# Altium PCB BenchSignalGenerator.PcbDoc (part 2 of 3)
Units mm, origin at the board's own origin, x right, y up, seen from the top; angles counter-clockwise.
Board outline 98.17 x 87.5 mm, 4 copper layers (Top Layer, Ground, 3.3, Bottom Layer), stack 0.603 mm thick; 75 components, 70 nets, 305 pads, 51 vias.
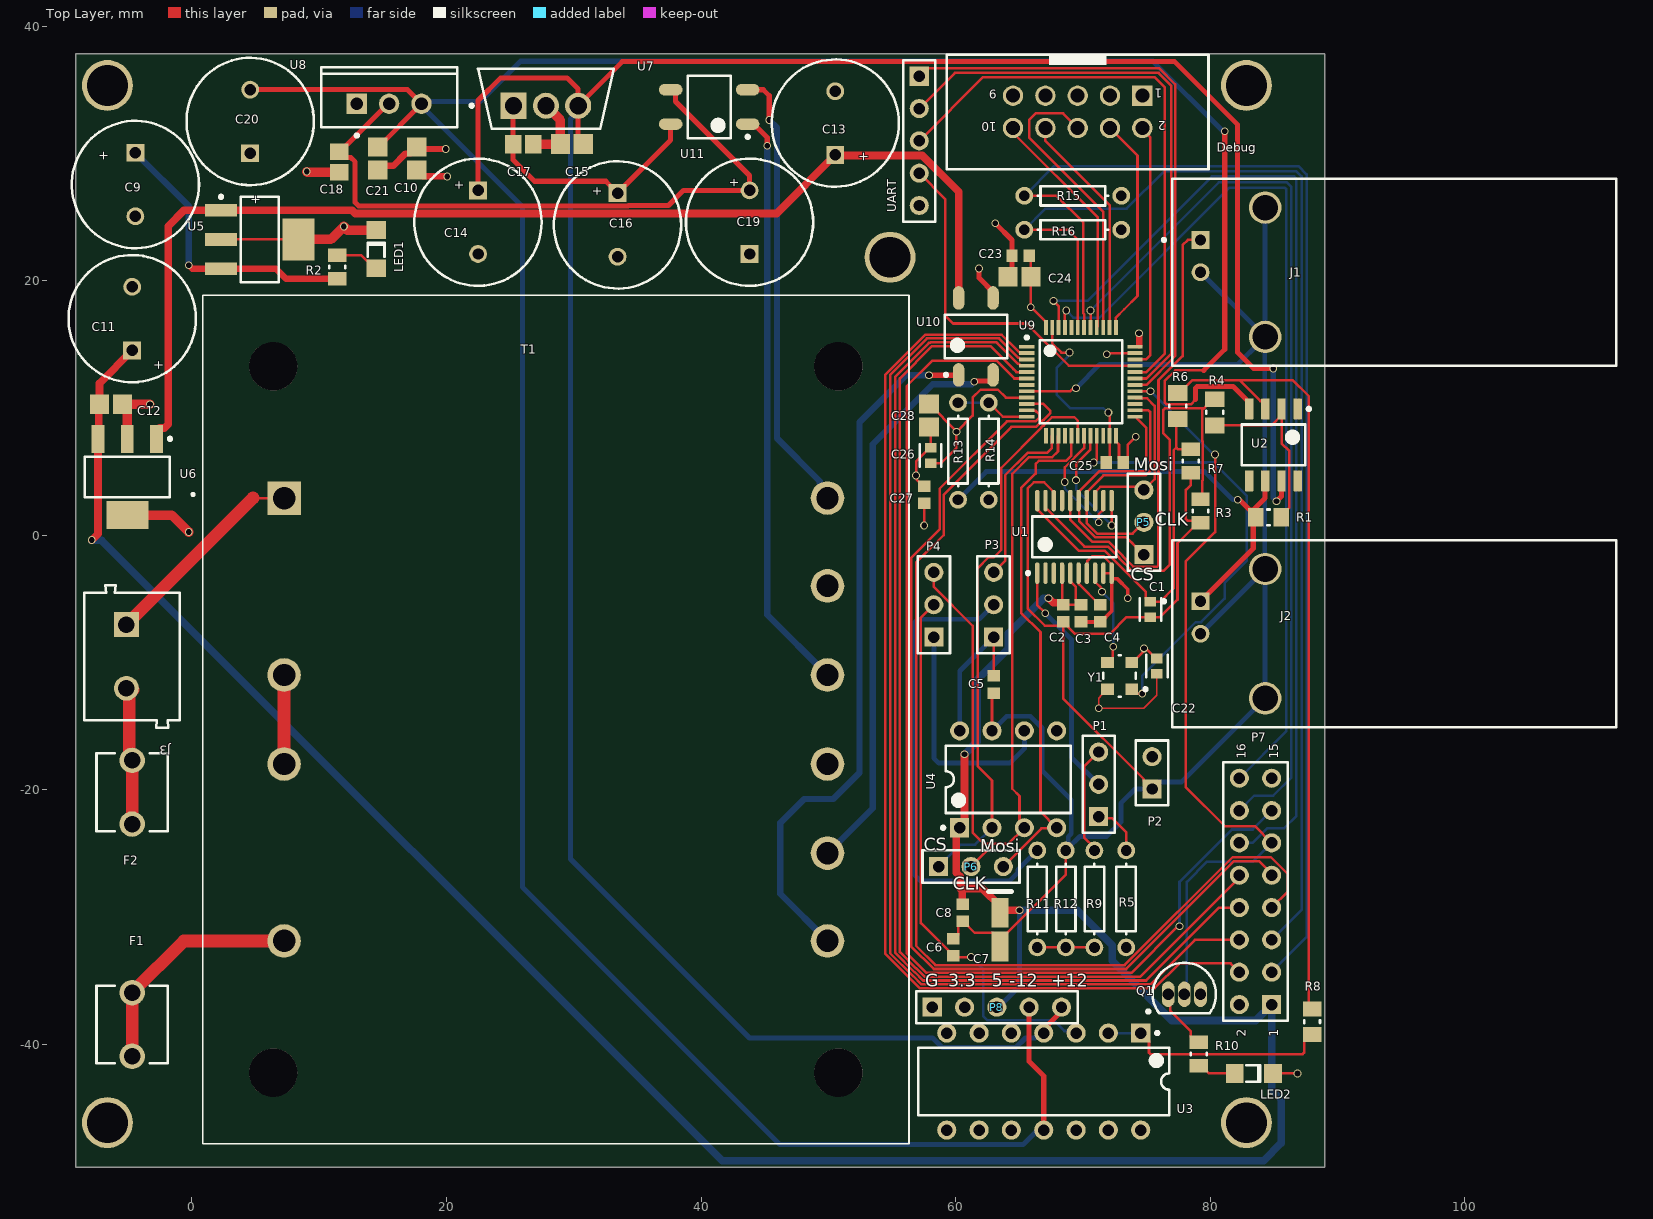
[diagram p0: Top Layer view]

## Part data (continued)
R4 R6: library part CMP-2001-03596-1, Case Code (Imperial)=0805, Case Code (Metric)=2012, Manufacturer="Vishay Dale", Max Operating Temperature=155°C, Max Power Dissipation=125mW, Min Operating Temperature=-55°C, Package Quantity=10000, Resistance=1kR, Supplier Part Number 1=541-CRCW08051K00FKEBCT-ND, Temperature Coefficient=100ppm/°C, Tolerance=1%, Voltage Rating=150V, Case/Package=0805, Category="Chip SMD Resistors", ComponentLink1Description=https://datasheet.ciiva.com/5548/dcrcwe3-109170-5548552.pdf?src-supplier=Mouser, ComponentLink1URL=https://datasheet.ciiva.com/5548/dcrcwe3-109170-5548552.pdf?src-supplier=Mouser, ComponentLink2Description=https://datasheet.ciiva.com/7725/1847332-7725820.pdf?src-supplier=Element14, ComponentLink2URL=https://datasheet.ciiva.com/7725/1847332-7725820.pdf?src-supplier=Element14, ComponentLink3Description=https://datasheet.ciiva.com/9112/dcrcwe3-9112206.pdf?src-supplier=Avnet, ComponentLink3URL=https://datasheet.ciiva.com/9112/dcrcwe3-9112206.pdf?src-supplier=Avnet, ComponentLink4Description=https://datasheet.ciiva.com/46391/1807946-46391934.pdf?src-supplier=Element14, ComponentLink4URL=https://datasheet.ciiva.com/46391/1807946-46391934.pdf?src-supplier=Element14, Composition="Thick Film", Contact Plating=Tin, Depth=1.25mm, Features="Automotive AEC-Q200", Height=0.02inch, Lead Free="Lead Free", Length=2mm, Manufacturer Part Number=CRCW08051K00FKEB, Military Standard=Not, Number of Pins=2, Number of Terminations=2, Packaging="Tape and Reel", Part Number=CRCW08051K00FKEB, Power Rating=125mW, Pricing 1="1=0.10000, 10=0.06000, 100=0.02450, 1000=0.01102, 2500=0.00957, 5000=0.00790 (USD)", Radiation Hardening=No, REACH SVHC=Unknown, RoHS=Yes, Stock 1=1, Supplier 1=Digi-Key, Termination=SMD/SMT, Voltage Rating (DC)=150V, Weight=0.000194oz, Width=1.25mm
R5 R9 R15 R16: "Resistor", LatestRevisionDate=17-Jul-2002, LatestRevisionNote="Re-released for DXP Platform.", PackageDescription="Axial Device, Thru-Hole; 2 Leads; 0.3 in Pin Spacing", PackageReference=AXIAL-0.3, Published=8-Jun-2000, Publisher="Altium Limited"
R11 R12 R13 R14: library part Res1, "Resistor", LatestRevisionDate=17-Jul-2002, LatestRevisionNote="Re-released for DXP Platform.", PackageDescription="Axial Device, Thru-Hole; 2 Leads; 0.3 in Pin Spacing", PackageReference=AXIAL-0.3, Published=8-Jun-2000, Publisher="Altium Limited"
T1: "International One-4-All Triple Output Transformer"
U1: library part CMP-0293-00051-1, "20 mW Power, 2.3 V to 5.5 V, 75 MHz Complete DDS, 10-Bit, Serial, RU-20, 1000 Reel, Pb-Free", Case/Package=TSSOP, Frequency=75MHz, Manufacturer="Analog Devices", Max Operating Temperature=105°C, Max Supply Current=5mA, Max Supply Voltage=5.5V, Min Operating Temperature=-40°C, Min Supply Voltage=2.3V, Nominal Output Voltage=600mV, Nominal Supply Current=8.7mA, Package Quantity=1000, Power Dissipation=40mW, Supplier Part Number 1=505-AD9834CRUZ-REEL7CT-ND, Category="Integrated Circuits (ICs)", Code_JEDEC=MO-153AC, Compliance Range (V)=800mV, ComponentLink1Description="Manufacturer URL", ComponentLink1URL=www.analog.com, ComponentLink2Description=Datasheet, ComponentLink2URL=http://www.analog.com/static/imported-files/data_sheets/AD9834.pdf, ComponentLink3Description="Package Specification", ComponentLink3URL=http://www.analog.com/static/imported-files/packages/364515793657813558433715854054607941441RU20.pdf, ComponentLink4Description=https://datasheet.ciiva.com/26828/ad9834cruz-reel7-26828141.pdf?src-supplier=IIIC, ComponentLink4URL=https://datasheet.ciiva.com/26828/ad9834cruz-reel7-26828141.pdf?src-supplier=IIIC, ComponentLink5Description=https://datasheet.ciiva.com/25889/ad9834-25889590.pdf?src-supplier=Avnet+Europe, ComponentLink5URL=https://datasheet.ciiva.com/25889/ad9834-25889590.pdf?src-supplier=Avnet+Europe, Contact Plating=Tin,Matte, DatasheetVersion="Rev. C", FS Iout (mA nom)=3mA, I Supply total (max)=8.7mA, I/O Interface=Serial, Lead Free="Contains Lead", Manufacturer Part Number=AD9834CRUZ-REEL7, Master fclk=75MHz, Mount="Surface Mount", Number of Bits=10, Number of Converters=1, Number of D/A Converters=1, Number of Outputs=1, Number of Pins=20, Operating Supply Current=8.7mA, PackageDescription="20-Lead Thin Shrink Small Outline Package [TSSOP]", PackageReference=RU-20, PackageVersion=2000, Packaging="Tape and Reel", Pricing 1="1=12.89000, 10=11.85000, 25=11.35920, 100=10.00820, 250=9.51700, 500=8.90300 (USD)", REFCLK Multiplier=No, Resolution=10b, Resolution (Bits)=10bit, RoHS=Yes, Signal to Noise Ratio (SNR)=60dB, Stock 1=1285, Supplier 1=Digi-Key, Tuning Word Width (bits)=28bit
U2: library part CMP-0055-00653-3, "Very High Speed, High Output Current, Voltage Feedback Amplifier, 8-pin Narrow SOIC, Pb-Free", Case/Package=SOIC, Dual Supply Voltage=9V, Input Bias Current=10uA, Input Offset Voltage (Vos)=200uV, Manufacturer="Texas Instruments", Max Dual Supply Voltage=18V, Max Operating Temperature=85°C, Max Supply Current=8mA, Max Supply Voltage=36V, Min Dual Supply Voltage=2.75V, Min Operating Temperature=-40°C, Min Supply Voltage=5.5V, Nominal Supply Current=6.5mA, Output Current=100mA, Output Current per Channel=118mA, Package Quantity=95, Package Reference=D0008A, PackageTopMarking=NSZXTT*LM71*71AIM, Power Supply Rejection Ratio (PSRR)=85dB, PowerWise=N, Voltage Gain=78dB, -3db Bandwidth=220MHz, Bandwidth=200MHz, Category="Amplifiers - Op Amps, Buffer, Instrumentation", Code_IPC=SOIC127P600-8, Code_JEDEC=MS-012-AA, Common Mode Rejection Ratio=80dB, ComponentLink1Description="Datasheet URL", ComponentLink1URL=http://www.ti.com/general/docs/lit/getliterature.tsp?genericPartNumber=LM7171&fileType=pdf, ComponentLink2Description=https://datasheet.ciiva.com/15130/getdatasheetpartid-88592-15130434.pdf?src-supplier=Verical, ComponentLink2URL=https://datasheet.ciiva.com/15130/getdatasheetpartid-88592-15130434.pdf?src-supplier=Verical, ComponentLink3Description=https://datasheet.ciiva.com/19465/1302289-19465118.pdf?src-supplier=Jameco, ComponentLink3URL=https://datasheet.ciiva.com/19465/1302289-19465118.pdf?src-supplier=Jameco, ComponentLink4Description=https://datasheet.ciiva.com/6626/lm7171-6626629.pdf?src-supplier=Digi-Key, ComponentLink4URL=https://datasheet.ciiva.com/6626/lm7171-6626629.pdf?src-supplier=Digi-Key, ComponentLink5Description=https://datasheet.ciiva.com/2973/lm7171-2973433.pdf?src-supplier=Avnet, ComponentLink5URL=https://datasheet.ciiva.com/2973/lm7171-2973433.pdf?src-supplier=Avnet, ComponentLink6Description=https://datasheet.ciiva.com/8008/1902708-8008895.pdf?src-supplier=Element14, ComponentLink6URL=https://datasheet.ciiva.com/8008/1902708-8008895.pdf?src-supplier=Element14, CompType=Amplifiers, Contact Plating=Tin,Matte, Gain Bandwidth Product=200MHz, Height=1.45mm, Lead Free="Lead Free", Length=4.9mm, Mount="Surface Mount", Number of Amplifiers=1, Number of Channels=1, Number of Circuits=1, Number Of Elements=1, Number of Pins=8, Operating Supply Current=6.5mA, Operating Supply Voltage=18V, PackageDescription="SOIC Narrow, 4.9 x 3.9 x 1.45mm, 8 Lead, 1.27mm Pitch", Packaging=Rail/Tube, PinCount=8, Pricing 1="1=4.25000, 10=3.81300, 25=3.60440, 100=2.96370, 250=2.65932, 500=2.56320, 1000=2.13066 (USD)", Radiation Hardening=No, REACH SVHC="No SVHC", RoHS=Y, Slew Rate=4100V/µs, Stock 1=1065, Unity Gain Bandwidth Product=125MHz, Width=3.9mm
U3: library part CMP-0017-00818-2, "JFET-Input Operational Amplifier, 7 to 36 V, 0 to 70 degC, 14-pin DIP (N14), Pb-Free (RoHS)", Case/Package=N, Dual Supply Voltage=9V, Input Bias Current=400pA, Input Offset Voltage (Vos)=15mV, Manufacturer="Texas Instruments", Max Dual Supply Voltage=18V, Max Operating Temperature=125°C, Max Power Dissipation=680mW, Min Dual Supply Voltage=3.5V, Min Operating Temperature=-40°C, Nominal Supply Current=11.2mA, Operating Supply Current=1.4mA, Package Quantity=25, Rating=Catalog, Total Supply Voltage(Max)(+5V is 5, +/-5V is 10)=36, Total Supply Voltage(Min)(+5V is 5, +/-5V is 10)=7, Voltage Gain=106.02dB, Bandwidth=3MHz, Category="Amplifiers - Op Amps, Buffer, Instrumentation", CMRR(Min)(dB)=70, Code_JEDEC=MS-001, Common Mode Rejection Ratio=70dB, ComponentLink1Description="Manufacturer URL", ComponentLink1URL=http://www.ti.com/, ComponentLink2Description=Datasheet, ComponentLink2URL=http://www.ti.com/lit/ds/symlink/tl084.pdf, ComponentLink3Description="Package Specification", ComponentLink3URL=http://www.ti.com/lit/ml/mpdi002c/mpdi002c.pdf, ComponentLink4Description=https://datasheet.ciiva.com/15129/getdatasheetpartid-40651-15129703.pdf?src-supplier=Verical, ComponentLink4URL=https://datasheet.ciiva.com/15129/getdatasheetpartid-40651-15129703.pdf?src-supplier=Verical, ComponentLink5Description=https://datasheet.ciiva.com/25628/0900766b800212d0-25628999.pdf?src-supplier=RSComponents, ComponentLink5URL=https://datasheet.ciiva.com/25628/0900766b800212d0-25628999.pdf?src-supplier=RSComponents, ComponentLink6Description=https://datasheet.ciiva.com/14151/tl081-tl084-eng-tds-14151110.pdf?src-supplier=Distrelec, ComponentLink6URL=https://datasheet.ciiva.com/14151/tl081-tl084-eng-tds-14151110.pdf?src-supplier=Distrelec, ComponentLink7Description=https://datasheet.ciiva.com/1796/tl081a-1796122.pdf?src-supplier=Digi-Key, ComponentLink7URL=https://datasheet.ciiva.com/1796/tl081a-1796122.pdf?src-supplier=Digi-Key, ComponentLink8Description=https://datasheet.ciiva.com/26243/tl082-26243803.pdf?src-supplier=Avnet+Europe, ComponentLink8URL=https://datasheet.ciiva.com/26243/tl082-26243803.pdf?src-supplier=Avnet+Europe, ComponentLink9Description=https://datasheet.ciiva.com/7709/1846992-7709948.pdf?src-supplier=Element14, ComponentLink9URL=https://datasheet.ciiva.com/7709/1846992-7709948.pdf?src-supplier=Element14, ComponentLink10Description=https://datasheet.ciiva.com/7709/94128-7709949.pdf?src-supplier=Element14, ComponentLink10URL=https://datasheet.ciiva.com/7709/94128-7709949.pdf?src-supplier=Element14, ComponentLink11Description=https://datasheet.ciiva.com/2974/tl082-2974257.pdf?src-supplier=Avnet, ComponentLink11URL=https://datasheet.ciiva.com/2974/tl082-2974257.pdf?src-supplier=Avnet, Contact Plating=Gold, DatasheetVersion=SLOS081G, Eco-Plan="Pb-Free (RoHS)", Gain Bandwidth Product=3MHz, GBW(Typ)(MHz)=3, Height=4.57mm, IIB(Max)(pA)=400, Iq per channel(Max)(mA)=2.8, Lead Free="Lead Free", Length=19.3mm, Manufacturer Part Number=TL084CN, Max I/O Voltage=15mV, Max Supply Voltage=18V, Mounting Technology="Through Hole", Nominal Gain Bandwidth Product=3MHz, Number of Amplifiers=4, Number of Channels=4, Number of Circuits=4, Number Of Elements=4, Number of Pins=14, Offset Drift(Typ)(uV/C)=18, PackageDescription="14-Pin Plastic In-Line, Body 19.305 x 6.35 mm, Pitch 2.54 mm", PackageReference=N0014A, PackageVersion="4040049/E, 12/2002", Packaging=Rail/Tube, PartNumber=TL084CN, Pricing 1="1=0.55000, 10=0.46900, 25=0.43760, 100=0.32500, 250=0.27500, 500=0.26250, 1000=0.19375, 2500=0.18125, 5000=0.16875 (USD)", Radiation Hardening=No, REACH SVHC="No SVHC", RoHS=Yes, Slew Rate=13V/µs, Slew Rate(Typ)(V/us)=13, Stock 1=8967, Sub Family="General Purpose Amplifier, High Supply Voltage Amplifier (>=30V)", Unity Gain Bandwidth Product=3MHz, Vio (25C)(Max)(mV)=15, Vn at 1kHz(Typ)(nV/rtHz)=18, Width=6.35mm
U4: library part CMP-0188-01065-1, "10-Bit DACs with Internal VREF and SPI Interface, 8-Pin PDIP, Extended Temperature", Case/Package=PDIP, Input Offset Voltage (Vos)=820uV, Max Operating Temperature=125°C, Max Supply Voltage=6.5V, Min Operating Temperature=-40°C, Min Supply Voltage=2.7V, Nominal Supply Current=415uA, Operating Supply Voltage=5.5V, Package Quantity=60, Reference Voltage=2.048V, Category="Digital to Analog Converters (DACs)", Code_JEDEC=MS-001, ComponentLink1Description="Manufacturer URL", ComponentLink1URL=http://www.microchip.com/, ComponentLink2Description=Datasheet, ComponentLink2URL=http://ww1.microchip.com/downloads/en/DeviceDoc/22249A.pdf, ComponentLink3Description="Package Specification", ComponentLink3URL=http://www.microchip.com/stellent/groups/techpub_sg/documents/packagingspec/en012702.pdf, ComponentLink4Description=https://datasheet.ciiva.com/41459/001083272-da-01-en-dac-10b-spi-vref-mcp4812-e-p-pdip-8-mcp-41459029.pdf?src-supplier=Conrad, ComponentLink4URL=https://datasheet.ciiva.com/41459/001083272-da-01-en-dac-10b-spi-vref-mcp4812-e-p-pdip-8-mcp-41459029.pdf?src-supplier=Conrad, ComponentLink5Description=https://datasheet.ciiva.com/3041/22249a-3041497.pdf?src-supplier=Avnet, ComponentLink5URL=https://datasheet.ciiva.com/3041/22249a-3041497.pdf?src-supplier=Avnet, ComponentLink6Description=https://datasheet.ciiva.com/6666/22249a-6666538.pdf?src-supplier=Digi-Key, ComponentLink6URL=https://datasheet.ciiva.com/6666/22249a-6666538.pdf?src-supplier=Digi-Key, ComponentLink7Description=https://datasheet.ciiva.com/16625/22249a-16625662.pdf?src-supplier=Avnet+Europe, ComponentLink7URL=https://datasheet.ciiva.com/16625/22249a-16625662.pdf?src-supplier=Avnet+Europe, DatasheetVersion="revA, Apr-2010", Height=4.95mm, Integral Nonlinearity (INL)=3.5LSB, Interface=SPI,Serial, Lead Free="Lead Free", Length=10.16mm, Mount="Through Hole", Number of Bits=10, Number of Channels=2, Number of Converters=2, Number of DAC Channels=2, Number of Pins=8, Output Type=Voltage, PackageDescription="8-Lead Plastic Dual In-Line (P) - 300 mil Body [PDIP]", PackageReference=PDIP300-P8, PackageVersion="revBB, Aug-2009", Packaging=Rail/Tube, Polarity=Bipolar, Pricing 1="1=2.11000, 25=1.76000, 100=1.60000 (USD)", Radiation Hardening=No, Resolution=10b, RoHS=Yes, Settling Time=4.5us, Stock 1=82, Supply Type=Single, Width=7.11mm
U5: library part CMP-0136-00514-1, "250 mA, 16V, Low Quiescent Current LDO Regulator, 3-Pin SOT-223, Extended Temperature", Case/Package=SOT-223, Dropout Voltage=525mV, Input Bias Current=2uA, Manufacturer=Microchip, Max Input Voltage=16V, Max Operating Temperature=125°C, Max Output Current=250mA, Min Input Voltage=2.7V, Min Operating Temperature=-40°C, Min Output Voltage=3.3V, Output Voltage Accuracy=2%, Package Quantity=78, Quiescent Current=5uA, Supplier Part Number 1=MCP1703-3302E/DB-ND, Accuracy=2%, Category="Voltage Regulators - Linear", ComponentLink1Description=https://datasheet.ciiva.com/3224/jp530937-3224135.pdf?src-supplier=Avnet, ComponentLink1URL=https://datasheet.ciiva.com/3224/jp530937-3224135.pdf?src-supplier=Avnet, ComponentLink2Description=https://datasheet.ciiva.com/8041/22049f-8041354.pdf?src-supplier=Element14, ComponentLink2URL=https://datasheet.ciiva.com/8041/22049f-8041354.pdf?src-supplier=Element14, ComponentLink3Description=https://datasheet.ciiva.com/15200/getdatasheetpartid-771601-15200250.pdf?src-supplier=Verical, ComponentLink3URL=https://datasheet.ciiva.com/15200/getdatasheetpartid-771601-15200250.pdf?src-supplier=Verical, ComponentLink4Description=https://datasheet.ciiva.com/2057/22049f-2057211.pdf?src-supplier=Digi-Key, ComponentLink4URL=https://datasheet.ciiva.com/2057/22049f-2057211.pdf?src-supplier=Digi-Key, ComponentLink5Description=https://datasheet.ciiva.com/29305/651421-da-01-en-ic-reg-ld-mcp1703-3302e-db-sot-223-3-mcp-29305285.pdf?src-supplier=Conrad, ComponentLink5URL=https://datasheet.ciiva.com/29305/651421-da-01-en-ic-reg-ld-mcp1703-3302e-db-sot-223-3-mcp-29305285.pdf?src-supplier=Conrad, Contact Plating=Tin,Matte, DatasheetVersion="revD, Sep-2009", Height=1.6mm, Lead Free="Lead Free", Length=6.5mm, Manufacturer Part Number=MCP1703-3302E/DB, Mount="Surface Mount", Nominal Output Voltage=3.3V, Number of Outputs=1, Number of Pins=3, Output Current=250mA, Output Type=Fixed, Output Voltage=3.3V, PackageDescription="3-Lead Plastic Small Outline Transistor (DB) [SOT-223]", PackageReference=SOT-223-DB3, PackageVersion="revBB, Aug-2009", Packaging=Rail/Tube, Polarity=Positive, Pricing 1="1=0.62000, 25=0.52000, 100=0.47000 (USD)", Radiation Hardening=No, REACH SVHC="No SVHC", RoHS=Yes, Stock 1=2370, Supplier 1=Digi-Key, Width=3.5mm
U6: library part CMP-0136-00522-1, "250 mA, 16V, Low Quiescent Current LDO Regulator, 3-Pin SOT-223, Extended Temperature", Case/Package=SOT-223, Dropout Voltage=330mV, Input Bias Current=2uA, Manufacturer=Microchip, Max Input Voltage=16V, Max Operating Temperature=125°C, Max Output Current=250mA, Min Input Voltage=2.7V, Min Operating Temperature=-40°C, Min Output Voltage=5V, Output Voltage Accuracy=2%, Package Quantity=78, Quiescent Current=5uA, Supplier Part Number 1=MCP1703-5002E/DB-ND, Accuracy=2%, Category="Voltage Regulators - Linear", ComponentLink1Description=https://datasheet.ciiva.com/41458/001085888-da-01-en-ic-reg-ld-mcp1703-5002e-db-sot-223-3-mcp-41458871.pdf?src-supplier=Conrad, ComponentLink1URL=https://datasheet.ciiva.com/41458/001085888-da-01-en-ic-reg-ld-mcp1703-5002e-db-sot-223-3-mcp-41458871.pdf?src-supplier=Conrad, ComponentLink2Description=https://datasheet.ciiva.com/2041/22049f-2041046.pdf?src-supplier=Digi-Key, ComponentLink2URL=https://datasheet.ciiva.com/2041/22049f-2041046.pdf?src-supplier=Digi-Key, ComponentLink3Description=https://datasheet.ciiva.com/3224/jp530937-3224136.pdf?src-supplier=Avnet, ComponentLink3URL=https://datasheet.ciiva.com/3224/jp530937-3224136.pdf?src-supplier=Avnet, ComponentLink4Description=https://datasheet.ciiva.com/8041/22049f-8041355.pdf?src-supplier=Element14, ComponentLink4URL=https://datasheet.ciiva.com/8041/22049f-8041355.pdf?src-supplier=Element14, ComponentLink5Description=https://datasheet.ciiva.com/15200/getdatasheetpartid-626576-15200251.pdf?src-supplier=Verical, ComponentLink5URL=https://datasheet.ciiva.com/15200/getdatasheetpartid-626576-15200251.pdf?src-supplier=Verical, ComponentLink6Description=https://datasheet.ciiva.com/16373/filehandler-aspxddocname-en530937-16373582.pdf?src-supplier=Future+Electronics, ComponentLink6URL=https://datasheet.ciiva.com/16373/filehandler-aspxddocname-en530937-16373582.pdf?src-supplier=Future+Electronics, ComponentLink7Description=https://datasheet.ciiva.com/22629/22049f-22629247.pdf?src-supplier=Farnell, ComponentLink7URL=https://datasheet.ciiva.com/22629/22049f-22629247.pdf?src-supplier=Farnell, DatasheetVersion="revD, Sep-2009", Height=1.6mm, Lead Free="Lead Free", Length=6.5mm, Manufacturer Part Number=MCP1703-5002E/DB, Mount="Surface Mount", Nominal Output Voltage=5V, Number of Outputs=1, Number of Pins=3, Output Current=250mA, Output Type=Fixed, Output Voltage=5V, PackageDescription="3-Lead Plastic Small Outline Transistor (DB) [SOT-223]", PackageReference=SOT-223-DB3, PackageVersion="revBB, Aug-2009", Packaging=Rail/Tube, Polarity=Positive, Pricing 1="1=0.62000, 25=0.52000, 100=0.47000 (USD)", Radiation Hardening=No, REACH SVHC="No SVHC", RoHS=Yes, Stock 1=5236, Supplier 1=Digi-Key, Width=3.5mm
U7: library part CMP-07128-000015-1, "IC REG LINEAR 12V 1A TO220-3", Dropout Voltage=2V, Manufacturer="ON Semiconductor", Max Supply Voltage=35V, Nominal Supply Current=5.1mA, Output Current=1A, Output Voltage=12V, Package=TO220B03, Temperature="-40°C to +125°C", Temperature Range High=+125°C, Temperature Range Low=-40°C, Accuracy Percentage=4%, Automotive=No, Category=IC, ComponentLink2Description=Datasheet, ComponentLink2URL=https://www.mouser.in/datasheet/2/308/LM7812-1125088.pdf, Device Class L1="Integrated Circuits (ICs)", Device Class L2="Power Management ICs", Device Class L3="Voltage Regulators - Linear", Digikey Description="IC REG LINEAR 12V 1A TO220-3", Height=20.4mm, Ipc Land Pattern Name=TO-220, Lead Free=Yes, Manufacturer Part Number=LM7812CT, Number of Outputs=1, Obsolete Part=true, Octopart=https://octopart.com/lm7812ct-on+semiconductor-14383031, Output Type=Fixed, RoHS=TRUE, Standoff Height=2.7mm
U8: library part CMP-0062-02499-3, "3-Terminal Negative Regulators, 3-pin TO-220", Case/Package=TO-220, Current Rating=500mA, Dropout Voltage=1.1V, Manufacturer="Texas Instruments", Max Input Voltage=-35V, Min Input Voltage=-14.5V, Output Voltage=-12V, Output Voltage Accuracy=4%, Package Quantity=45, PackageTopMarking=NSUZXYTTE#*LM79M*12CT, PowerWise=N, Quiescent Current=3mA, Supplier Part Number 1=2156-LM79M12CT-ND, Accuracy=4%, Category="Voltage Regulators - Linear", ComponentLink1Description="Datasheet URL", ComponentLink1URL=http://www.ti.com/general/docs/lit/getliterature.tsp?genericPartNumber=LM79M12&fileType=pdf, ComponentLink2Description=https://datasheet.ciiva.com/3225/lm79m12-3225442.pdf?src-supplier=Avnet, ComponentLink2URL=https://datasheet.ciiva.com/3225/lm79m12-3225442.pdf?src-supplier=Avnet, ComponentLink3Description=https://datasheet.ciiva.com/6583/lm79m05-6583721.pdf?src-supplier=Digi-Key, ComponentLink3URL=https://datasheet.ciiva.com/6583/lm79m05-6583721.pdf?src-supplier=Digi-Key, ComponentLink4Description=https://datasheet.ciiva.com/15111/getdatasheetpartid-55274-15111210.pdf?src-supplier=Verical, ComponentLink4URL=https://datasheet.ciiva.com/15111/getdatasheetpartid-55274-15111210.pdf?src-supplier=Verical, CompType="LDO IC", Lead Free="Contains Lead", Manufacturer Part Number=LM79M12CT, Max Output Current=500mA, Mount="Through Hole", Number of Outputs=1, Number of Pins=3, Number of Regulators=1, Output Current=500mA, Output Type=Fixed, PackageDescription="TO-220, Molded, 3 Lead, Straight", PackageReference=NDE0003A, Packaging=Rail/Tube, PinCount=3, Polarity=Negative, Pricing 1="358=250.60000 (USD)", Radiation Hardening=No, RoHS=N, Stock 1=430, Supplier 1=Digi-Key
U9: library part CMP-12105-000047-1, "IC MCU 32BIT 256KB FLASH 48LQFP", Ambient Temperature Range High=+85°C, Ambient Temperature Range Low=-40°C, Case/Package=LQFP, Frequency=80MHz, Manufacturer=STMicroelectronics, Max Junction Temp=+105°C, Max Operating Temperature=85°C, Max Supply Voltage=3.6V, Min Supply Voltage=1.55V, Package=LQFP48-5B, Supplier Part Number 1=497-16579-ND, Temperature="-40°C to +85°C", Automotive=No, Category=IC, ComponentLink1Description=http://www.farnell.com/datasheets/2283392.pdf?src-supplier=Farnell, ComponentLink1URL=http://www.farnell.com/datasheets/2283392.pdf?src-supplier=Farnell, ComponentLink2Description=Datasheet, ComponentLink2URL=https://www.st.com/resource/en/datasheet/stm32l433cc.pdf, ComponentLink3Description=http://www.farnell.com/datasheets/2283392.pdf?src-supplier=Newark, ComponentLink3URL=http://www.farnell.com/datasheets/2283392.pdf?src-supplier=Newark, ComponentLink4Description=http://www.st.com/content/ccc/resource/technical/document/datasheet/f7/a0/fc/27/24/4e/4f/3f/DM00257192.pdf/files/DM00257192.pdf/jcr:content/translations/en.DM00257192.pdf?src-supplier=Digi-Key, ComponentLink4URL=http://www.st.com/content/ccc/resource/technical/document/datasheet/f7/a0/fc/27/24/4e/4f/3f/DM00257192.pdf/files/DM00257192.pdf/jcr:content/translations/en.DM00257192.pdf?src-supplier=Digi-Key, ComponentLink5Description=http://www.farnell.com/datasheets/2283392.pdf?src-supplier=Element14, ComponentLink5URL=http://www.farnell.com/datasheets/2283392.pdf?src-supplier=Element14, Core Architecture="Arm Cortex-M4", Data Bus Width=32bits, Device Class L1="Integrated Circuits (ICs)", Device Class L2="Embedded Processors and Controllers", Device Class L3=Microcontrollers, Digikey Description="IC MCU 32BIT 256KB FLASH 48LQFP", Height=1.6mm, Interface=I2C,SPI,UART,USART,CAN,USB,LIN,IrDA,SMBus,Other, Ipc Land Pattern Name=QFP50P900X900X160-48, Lead Free=Yes, Manufacturer Part Number=STM32L433CCT6, Memory Size=256KBytes, Memory Type=FLASH, Min Operating Temperature=-40°C, Number Of A/D Converters=1, Number Of Adc Channels=10, Number Of Cores=1, Number Of I2C Channels=3, Number Of I/Os=38, Number Of Pwm Channels=14, Number Of Spi Channels=3, Number Of Timers/Counters=9, Number Of Uart Channels=4, Number Of Usb Channels=1, Octopart=https://octopart.com/stm32l433cct6-stmicroelectronics-71093511, Oscillator Type=Internal, Packaging=Tray, Peripherals="Brown-out Detect/Reset,PWM,WDT,DMA,LCD", Pricing 1="1=5.73000, 10=5.15000, 25=4.86840, 100=4.21940, 250=4.00304, 500=3.59190, 1000=3.02932, 2500=2.87786, 5000=2.76966 (USD)", Ram Size=64KBytes, RoHS=TRUE, Standoff Height=0.05mm, Stock 1=5865, Supplier 1=Digi-Key, Temperature Range High=+85°C, Temperature Range Low=-40°C
U10 U11: library part CMP-019-00049-1, "DIODE SCHOTTKY 1A 40V TO-269AA", Max Reverse Leakage Current=5mA, Max Surge Current=30A, Package Quantity=2500, Mount="Surface Mount", Packaging="Tape and Reel"
Y1: library part CMP-27762-000017-1, "MEMS OSC XO 25.0000MHZ CMOS SMD", Frequency=25MHz, Load Capacitance=15pF, Manufacturer=Abracon, Manufacturer Part Number=ASEMB-25.000MHZ-LC-T, Max Junction Temp=+150°C, Max Supply Current=15mA, Max Supply Voltage=3.3V, Min Supply Voltage=1.8V, Package=ASEMB, Temperature="-40°C to +85°C", Temperature Range High=+85°C, Temperature Range Low=-40°C, Automotive=No, Category=Crys, ComponentLink2Description=Datasheet, ComponentLink2URL=https://abracon.com/Oscillators/ASEMB.pdf, Device Class L1="Passive Components", Device Class L2="Crystals / Oscillators", Device Class L3=Oscillators, Digikey Description="MEMS OSC XO 25.0000MHZ CMOS SMD", Footprint Url=https://abracon.com/Support/PackageDrawing/Oscillators/ASEMB.PDF, Height=0.9mm, Lead Free=Yes, Mouser Description="Standard Clock Oscillators 25.000MHZ 50ppm -40 + 85C", Octopart=https://octopart.com/asemb-25.000mhz-lc-t-abracon-21704580, RoHS=TRUE, Series=ASEMB, Stability=50ppm

## Free pads (board coordinates)
  round 4 hole 3.2: 10(-6.644,-46.17) 11(-6.644,35.33) 12(82.856,35.33) 13(82.856,-46.17) 14(54.856,21.83)

## Via types
v1: diameter 0.61, hole 0.45, Top Layer to Bottom Layer, 51 vias